# EAGLE board TeensyLinduinoShieldNoShifter (EAGLE 8.1.0)
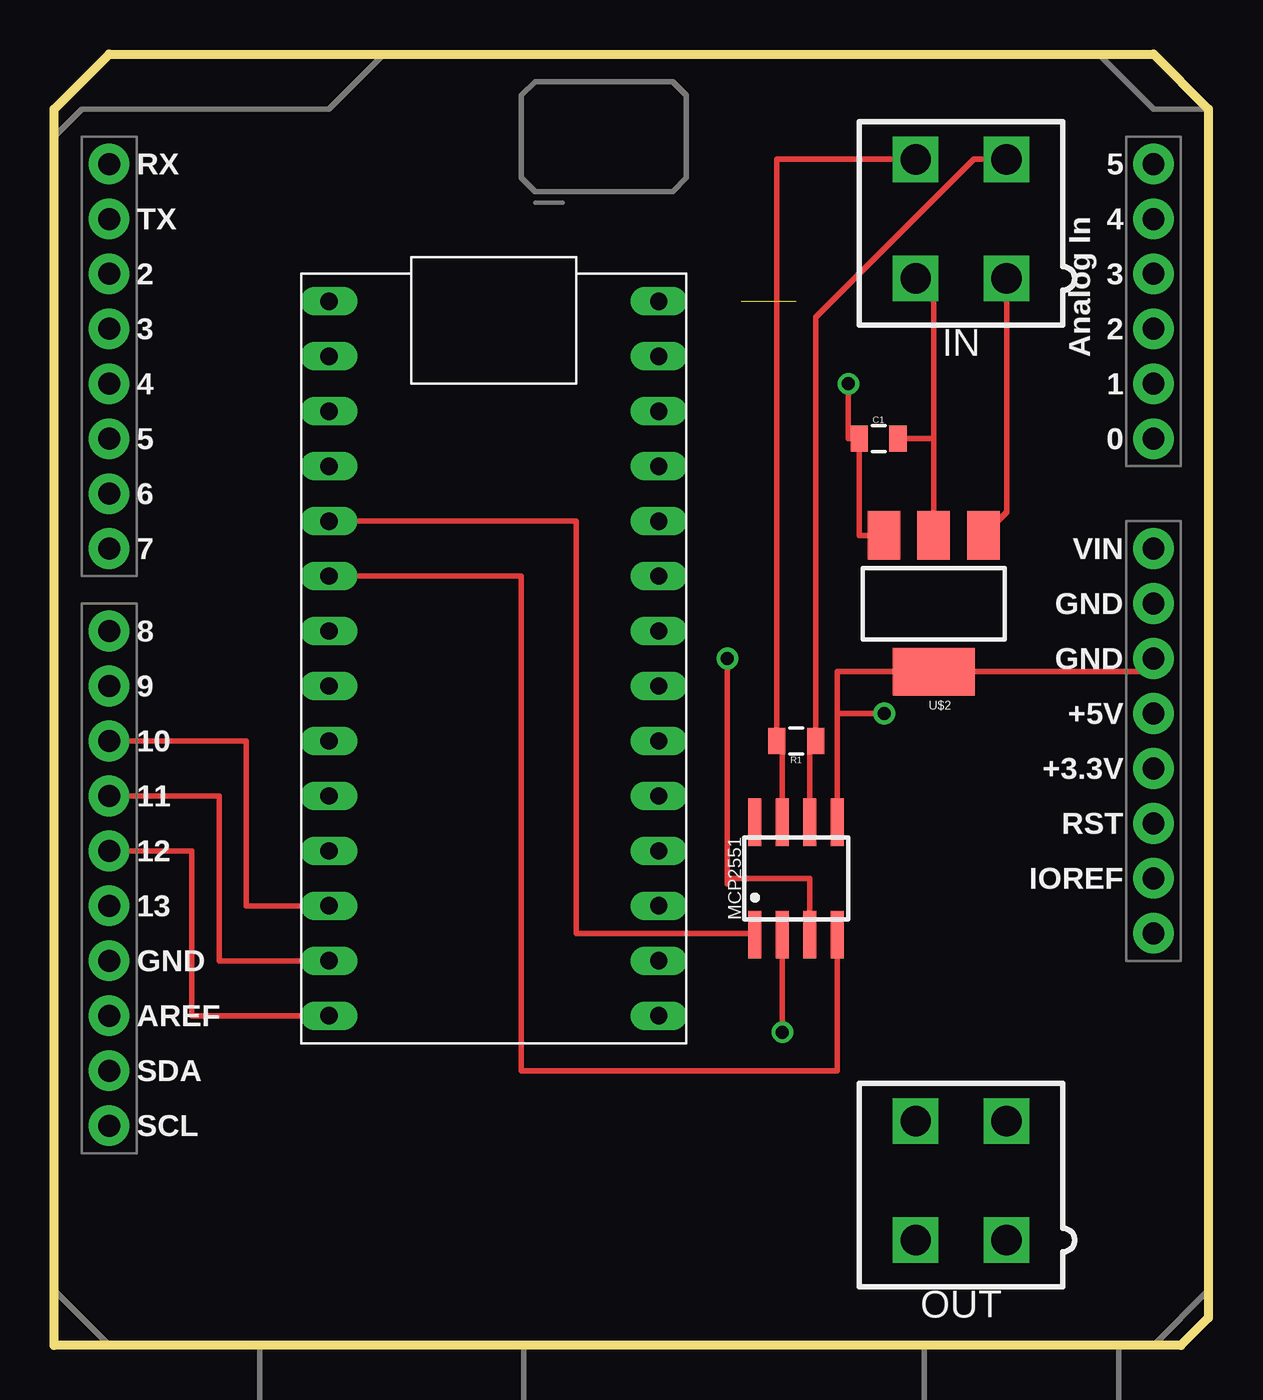
[diagram p0: board, top side]
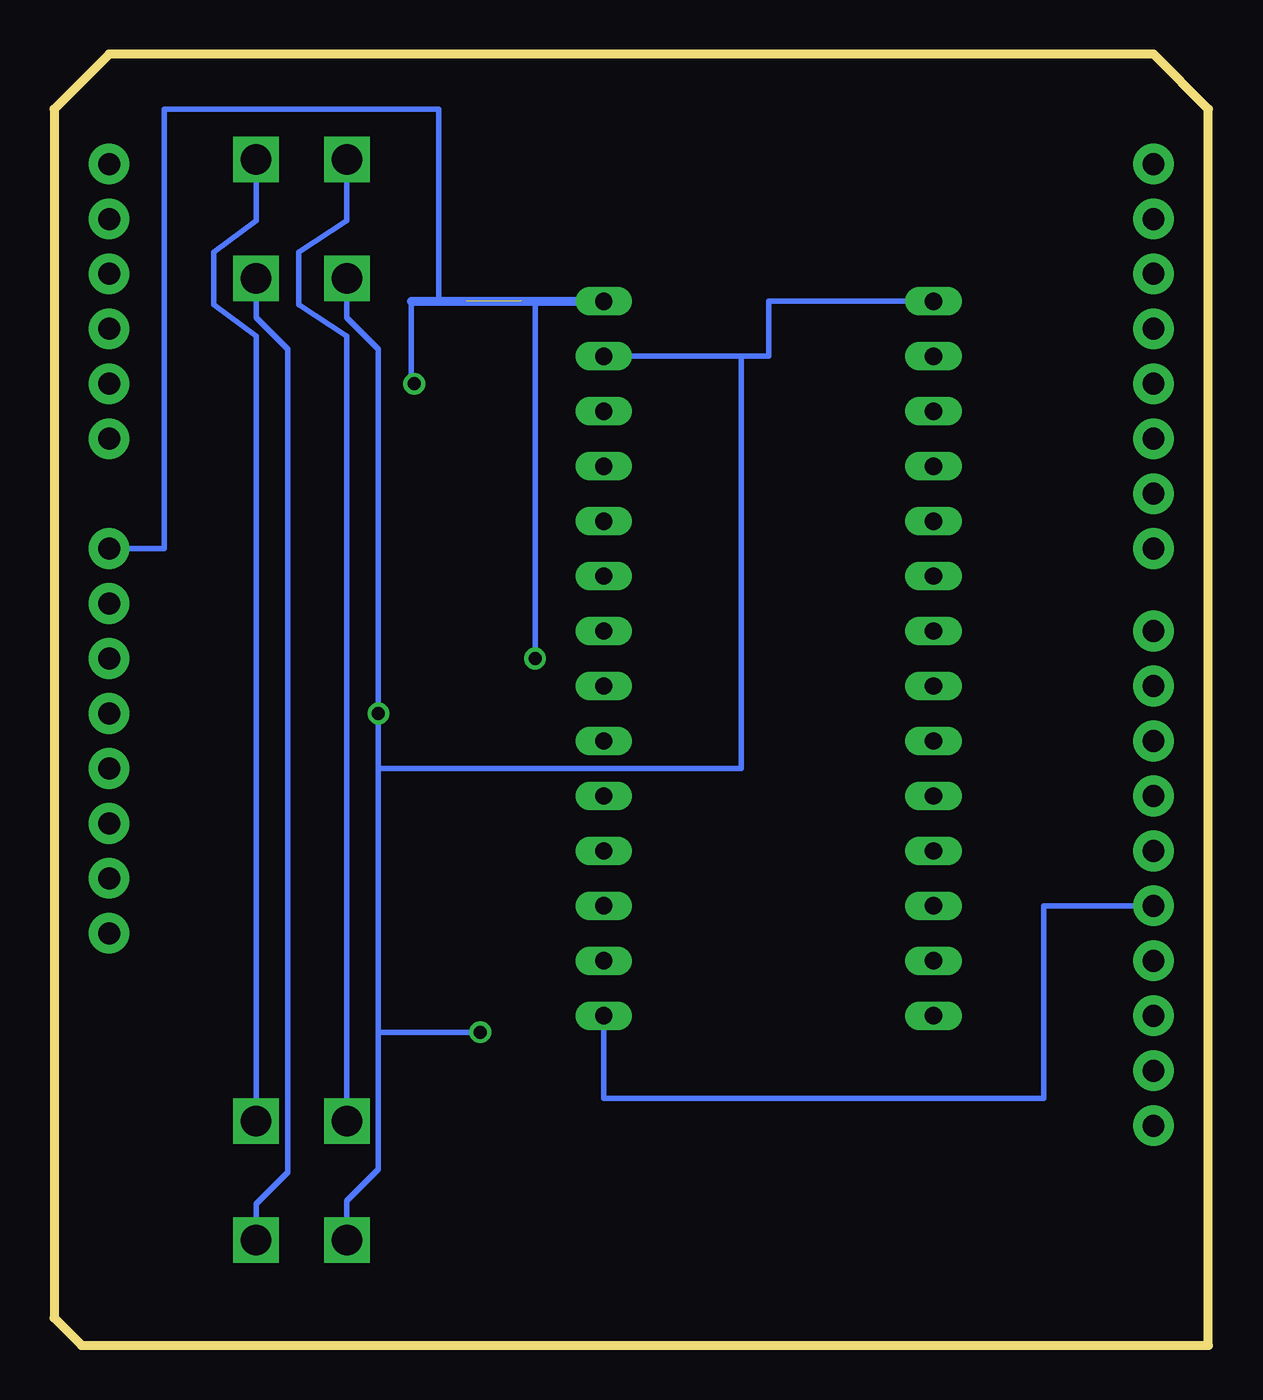
[diagram p1: board, bottom side, seen from below]

Size 53.34 x 59.69 mm. Coordinates in mm from the lower left corner, seen from the top.
Outline: 0,0 0,57.15 2.54,59.69 50.8,59.69 53.34,57.15 53.34,1.27 52.07,0 0,0
Copper layers (1*16): Top 0.035mm / dielectric 1.5mm / Bottom 0.035mm
Design rules "default": minimum track width 10mil, minimum drill 24mil, track to track 8mil, track to pad 8mil, pad to pad 8mil, via to via 8mil, smd to smd 8mil, copper to edge 40mil, drill to drill 8mil, minimum pad ring 10mil, minimum via ring 8mil, stop-mask expansion 4mil, vias tented up to drill 0mil, thermal gap 10mil

## Footprints (pad centres in the part's own frame; a part is rotated, then mirrored left to right if it is on the bottom)
0805 = smd 0.8 x 1.2: 1 -0.9,0; 2 0.9,0
MINIFIT_5566-4 = drill 1.4 square: 1 2.1,-2.75; 2 -2.1,-2.75; 3 2.1,2.75; 4 -2.1,2.75
UNO_R3_SHIELD = drill 1.016 pad 1.88: 3.3V 50.8,26.67; 5V 50.8,29.21; A0 50.8,41.91; A1 50.8,44.45; A2 50.8,46.99; A3 50.8,49.53; A4 50.8,52.07; A5 50.8,54.61; AREF 2.54,15.24; D2 2.54,49.53; D3 2.54,46.99; D4 2.54,44.45; D5 2.54,41.91; D6 2.54,39.37; D7 2.54,36.83; D8 2.54,33.02; D9 2.54,30.48; D10 2.54,27.94; D11 2.54,25.4; D12 2.54,22.86; D13 2.54,20.32; GND@0 50.8,31.75; GND@1 50.8,34.29; GND@2 2.54,17.78; IOREF 50.8,21.59; NC 50.8,19.05; RES 50.8,24.13; RX 2.54,54.61; SCL 2.54,10.16; SDA 2.54,12.7; TX 2.54,52.07; VIN 50.8,36.83
SOIC-08 = smd 0.6 x 2.2: 1 -1.905,-2.6; 2 -0.635,-2.6; 3 0.635,-2.6; 4 1.905,-2.6; 5 1.905,2.6; 6 0.635,2.6; 7 -0.635,2.6; 8 -1.905,2.6
TEENSY_3.2_SIMPLE = drill 0.8 long: 3.3V 16.51,29.21; A0 16.51,3.81; A1 16.51,6.35; A2 16.51,8.89; A3 16.51,11.43; A4 16.51,13.97; A5 16.51,16.51; A6 16.51,19.05; A7 16.51,21.59; A8 16.51,24.13; A9 16.51,26.67; AGND 16.51,31.75; D0(RX1) 1.27,31.75; D1(TX1) 1.27,29.21; D2 1.27,26.67; D3(CANTX) 1.27,24.13; D4(CANRX) 1.27,21.59; D5 1.27,19.05; D6 1.27,16.51; D7(RX3) 1.27,13.97; D8(TX3) 1.27,11.43; D9(RX2) 1.27,8.89; D10(TX2) 1.27,6.35; D11 1.27,3.81; D12 1.27,1.27; D13 16.51,1.27; GND 1.27,34.29; VIN 16.51,34.29
SOT223 = smd 1.5 x 2.235: 1 -2.3,-3.15; 2 0,-3.15; 3 2.3,-3.15 | smd 3.8 x 2.2: 4 0,3.15

## Placement (x,y rotation side)
C1  0.1uF  [0805]  38.1,41.91 0 top
IN  CONNECTOR-4  [MINIFIT_5566-4]  41.91,52.07 0 top
J1  ARDUINO_R3_SHIELD  [UNO_R3_SHIELD]  0,0 0 top
MCP2551  MCP2551  [SOIC-08]  34.29,21.59 0 top
OUT  CONNECTOR-4  [MINIFIT_5566-4]  41.91,7.62 0 top
R1  120  [0805]  34.29,27.94 180 top
U$1  TEENSY_3.2_SIMPLE  [TEENSY_3.2_SIMPLE]  11.43,13.97 0 top
U$2  [SOT223]  40.64,34.29 180 top

## Library data of the parts
C1 J1 MCP2551 R1 U$1 U$2 = HyTechDevices
IN OUT = HyTechDevices; OC_FARNELL: unknown; OC_NEWARK: unknown

## Nets
12V_SUPPLY: IN.1 OUT.1 U$2.1
CANH: IN.4 MCP2551.7 OUT.4 R1.2
CANL: IN.3 MCP2551.6 OUT.3 R1.1
GND: C1.2 IN.2 J1.GND@0 MCP2551.2 MCP2551.5 OUT.2 U$1.AGND U$1.GND U$2.2 U$2.4
N$1: J1.D10 U$1.D10(TX2)
N$2: J1.D11 U$1.D11
N$3: J1.D12 U$1.D12
N$4: J1.D13 U$1.D13
N$5: C1.1 J1.VIN MCP2551.3 U$1.VIN U$2.3
N$8: MCP2551.1 U$1.D3(CANTX)
N$9: MCP2551.4 U$1.D4(CANRX)

## Tracks (layer width: path | path; a pad name or v marks a point on that pad's centre or on a via)
12V_SUPPLY
  Top 0.254: IN.1 44.01,38.51 U$2.1
  Bottom 0.254: IN.1 44.01,47.51 42.55,46.05 42.55,8.01 44.01,6.55 OUT.1
CANH
  Top 0.254: IN.4 33.39,54.82 R1.2 33.66,27.94 MCP2551.7
  Bottom 0.254: OUT.4 39.81,46.65 42.03,48.1 42.03,50.54 39.81,51.99 IN.4
CANL
  Top 0.254: IN.3 42.48,54.82 35.19,47.52 R1.1 34.92,27.94 MCP2551.6
  Bottom 0.254: OUT.3 44.01,46.65 45.97,48.1 45.97,50.54 44.01,51.99 IN.3
GND  (via drill 0.6)
  Top 0.254: IN.2 40.64,49.32 40.64,41.91 | 40.64,41.91 U$2.2 | C1.2 40.64,41.91 | J1.GND@0 50.8,31.14 U$2.4 36.2,31.14 36.2,29.21 | 36.2,29.21 MCP2551.5 | MCP2551.2 v33.66,14.48 | 36.2,29.21 v38.35,29.21
  Bottom 0.254: IN.2 39.81,47.51 38.35,46.05 v38.35,29.21 38.35,26.67 | OUT.2 39.81,6.68 38.35,8.14 38.35,14.48 | 38.35,26.67 38.35,14.48 | v33.66,14.48 38.35,14.48 | U$1.GND 20.32,48.26 20.32,45.72 21.59,45.72 | 21.59,45.72 U$1.AGND | 21.59,45.72 21.59,26.67 38.35,26.67
N$1
  Top 0.254: J1.D10 8.89,27.94 8.89,20.32 U$1.D10(TX2)
N$2
  Top 0.254: J1.D11 7.62,25.4 7.62,17.78 U$1.D11
N$3
  Top 0.254: J1.D12 6.35,22.86 6.35,15.24 U$1.D12
N$4
  Bottom 0.254: J1.D13 7.62,20.32 7.62,11.43 27.94,11.43 U$1.D13
N$5  (via drill 0.6)  (1 unrouted)
  Top 0.254: U$2.3 37.2,37.44 C1.1 36.7,41.91 v36.7,44.45 | v31.11,31.75 31.11,21.59 | 31.11,21.59 31.11,21.34 | 31.11,21.59 34.92,21.59 MCP2551.3
  Bottom 0.254: v36.7,44.45 36.83,44.45 36.83,48.26 | 31.75,48.26 31.11,48.26 v31.11,31.75 | 34.29,48.26 35.56,48.26 35.56,57.15 48.26,57.15 48.26,36.83 J1.VIN
  Bottom 0.406: 36.83,48.26 34.29,48.26 U$1.VIN
N$8
  Top 0.254: U$1.D3(CANTX) 24.13,38.1 24.13,19.05 32.38,19.05 MCP2551.1
N$9
  Top 0.254: U$1.D4(CANRX) 21.59,35.56 21.59,12.7 36.2,12.7 MCP2551.4